# EAGLE board Food Contamination Detector (EAGLE 8.6.2)
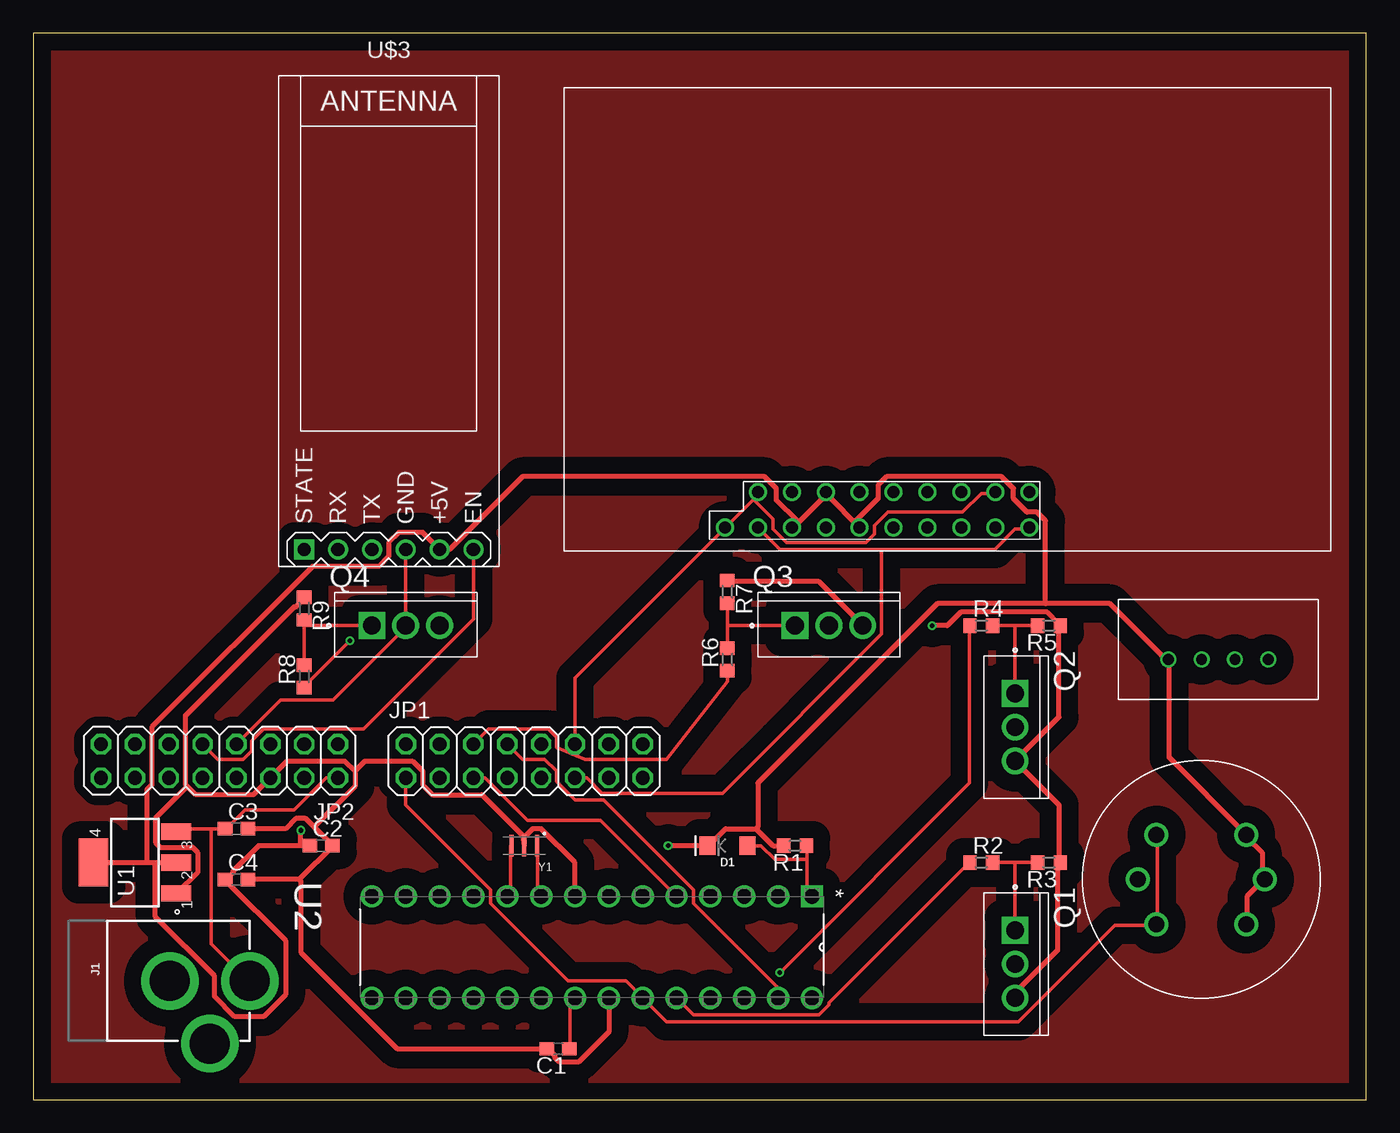
[diagram p0: board, top side]
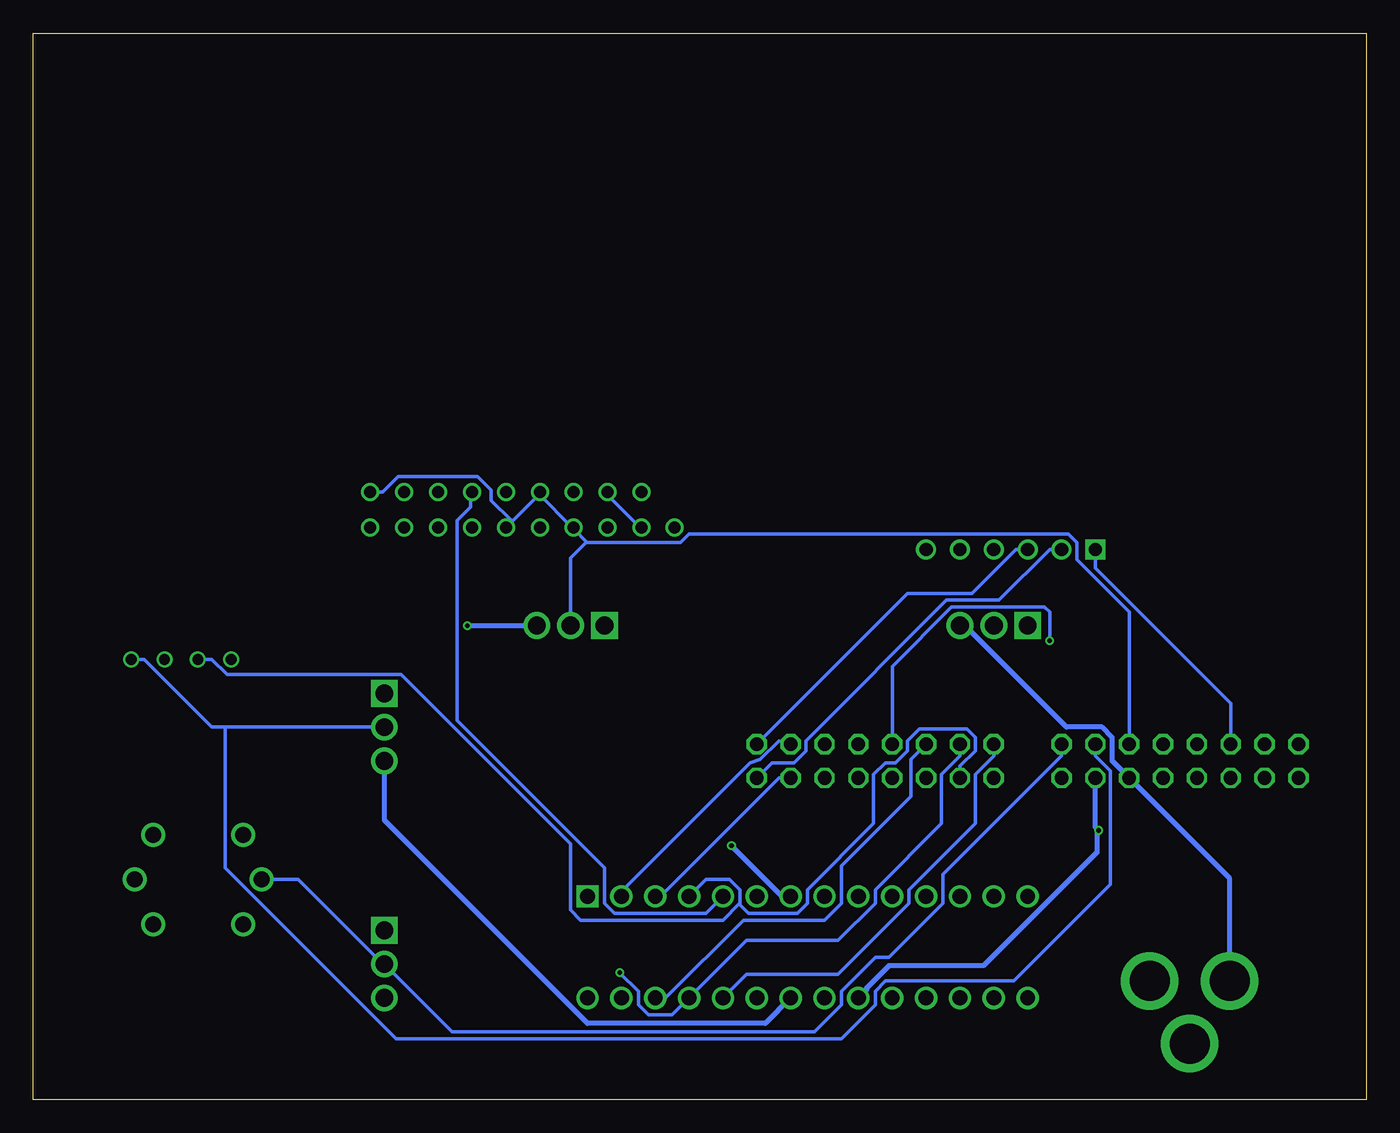
[diagram p1: board, bottom side, seen from below]

Size 100 x 80 mm. Coordinates in mm from the lower left corner, seen from the top.
Outline: 0,0 100,0 100,80 0,80 0,0
Copper layers (1*16): Top 0.035mm / dielectric 1.5mm / Bottom 0.035mm
Design rules "PCBWay_2layer": minimum track width 6mil, minimum drill 0.3mm, track to track 6mil, track to pad 6mil, pad to pad 6mil, via to via 6mil, smd to smd 4mil, copper to edge 10mil, drill to drill 6mil, minimum pad ring 6mil, minimum via ring 6mil, stop-mask expansion 4mil, vias tented up to drill 0.8mm, thermal gap 10mil
Net classes: 0 default: width 0.254 mm, drill 0.254 mm, clearance 0.254 mm; 1 ground: width 0.381 mm, drill 0.254 mm, clearance 0.254 mm; 2 5V: width 0.381 mm, drill 0.254 mm, clearance 0.254 mm

## Footprints (pad centres in the part's own frame; a part is rotated, then mirrored left to right if it is on the bottom)
C0603 = smd 1.1 x 1: 1 -0.85,0; 2 0.85,0
LED-1206 = smd 1.2 x 1.4: A -1.5,0; C 1.5,0
POWER_JACK_PTH = drill 2.997 pad 4.318: GND 0,7.7; GNDBREAK 4.7,10.7; PWR 0,13.7
2X08 = drill 1.016 octagon: 1 -8.89,-1.27; 2 -8.89,1.27; 3 -6.35,-1.27; 4 -6.35,1.27; 5 -3.81,-1.27; 6 -3.81,1.27; 7 -1.27,-1.27; 8 -1.27,1.27; 9 1.27,-1.27; 10 1.27,1.27; 11 3.81,-1.27; 12 3.81,1.27; 13 6.35,-1.27; 14 6.35,1.27; 15 8.89,-1.27; 16 8.89,1.27
TO254P1067X483X3124-3P = drill 1.34 square: 1 -2.54,0 | drill 1.34: 2 0,0; 3 2.54,0
R0603 = smd 1 x 1.1: 1 -0.85,0; 2 0.85,0
SOT223 = smd 2.235 x 1.219: 1 -3.099,2.311; 2 -3.099,0; 3 -3.099,-2.311 | smd 2.2 x 3.6: 4 3.099,0
DIP254P762X457-28 = drill 1.118 square: 1 -7.62,33.02 | drill 1.118: 2 -7.62,30.48; 3 -7.62,27.94; 4 -7.62,25.4; 5 -7.62,22.86; 6 -7.62,20.32; 7 -7.62,17.78; 8 -7.62,15.24; 9 -7.62,12.7; 10 -7.62,10.16; 11 -7.62,7.62; 12 -7.62,5.08; 13 -7.62,2.54; 14 -7.62,0; 15 0,0; 16 0,2.54; 17 0,5.08; 18 0,7.62; 19 0,10.16; 20 0,12.7; 21 0,15.24; 22 0,17.78; 23 0,20.32; 24 0,22.86; 25 0,25.4; 26 0,27.94; 27 0,30.48; 28 0,33.02
DHT22 = drill 0.8: 1 -3.75,0; 2 -1.25,0; 3 1.25,0; 4 3.75,0
MH-Z14 = drill 0.9: 1 -6.6,-15.5; 2 -6.6,-12.85; 3 -4.05,-15.5; 4 -4.05,-12.85; 5 -1.5,-15.5; 6 -1.5,-12.85; 7 1.05,-15.5; 8 1.05,-12.85; 9 3.6,-15.5; 10 3.6,-12.85; 11 6.15,-15.5; 12 6.15,-12.85; 13 -14.2,-12.85; 14 -11.65,-12.85; 15 -9.1,-12.85; 16 -9.1,-15.5; 17 -11.65,-15.5; 18 -14.2,-15.5; 19 -16.7,-15.5
WIRELESS-BLUETOOTH-HC-05 = drill 1 square: 1 -6.35,-17.145 | drill 1: 2 -3.81,-17.145; 3 -1.27,-17.145; 4 1.27,-17.145; 5 3.81,-17.145; 6 6.35,-17.145
TGS822 = drill 1.2 pad 1.6: 1 3.36,3.36; 2 4.75,0; 3 3.36,-3.36; 4 -3.36,-3.36; 5 -4.75,0; 6 -3.36,3.36
OSC_CSTCE16M0V53-R0 = smd 0.3 x 1.6: 1 -0.95,0; 2 0,0; 3 0.95,0

## Placement (x,y rotation side)
C1  100nF  [C0603]  39.37,3.81 180 top
C2  100nF  [C0603]  21.59,19.05 0 top
C3  0.33uF  [C0603]  15.24,20.32 0 top
C4  0.33uF  [C0603]  15.24,16.51 0 top
D1  [LED-1206]  52.07,19.05 180 top
J1  POWER_JACK  [POWER_JACK_PTH]  2.54,8.89 270 top
JP1  [2X08]  36.83,25.4 0 top
JP2  [2X08]  13.97,25.4 180 top
Q1  IRLZ44NPBF  [TO254P1067X483X3124-3P]  73.66,10.16 270 top
Q2  IRLZ44NPBF  [TO254P1067X483X3124-3P]  73.66,27.94 270 top
Q3  IRLZ44NPBF  [TO254P1067X483X3124-3P]  59.69,35.56 0 top
Q4  IRLZ44NPBF  [TO254P1067X483X3124-3P]  27.94,35.56 0 top
R1  10k  [R0603]  57.15,19.05 180 top
R2  10  [R0603]  71.12,17.78 0 top
R3  10k  [R0603]  76.2,17.78 180 top
R4  10  [R0603]  71.12,35.56 0 top
R5  10k  [R0603]  76.2,35.56 180 top
R6  10  [R0603]  52.07,33.02 90 top
R7  10k  [R0603]  52.07,38.1 270 top
R8  10  [R0603]  20.32,31.75 90 top
R9  10k  [R0603]  20.32,36.83 270 top
U1  LD1117S33CTR  [SOT223]  7.62,17.78 180 top
U2  ATMEGA328P-PU  [DIP254P762X457-28]  25.4,7.62 270 top
U$1  DHT22  [DHT22]  88.9,33.02 0 top
U$2  MHZ14  [MH-Z14]  68.58,58.42 0 top
U$3  WIRELESS-BLUETOOTH-HC-05  [WIRELESS-BLUETOOTH-HC-05]  26.67,58.42 0 top
U$4  TGS822  [TGS822]  87.63,16.51 0 top
Y1  CSTCE16M0V53-R0  [OSC_CSTCE16M0V53-R0]  36.83,19.05 180 top

## Library data of the parts
C1-C4 = rcl; SPICEPREFIX: C
D1 = SparkFun-LED
J1 = SparkFun-Connectors; PROD_ID: CONN-08197
JP1 JP2 = pinhead
Q1-Q4 = TO254P1067X483X3124-3P
R1-R9 = rcl; SPICEPREFIX: R
U1 = LD1117S33CTR; AVAILABILITY: Good; DESCRIPTION: LD1117 Series 1300 mA 3.3 V Fixed Output Positive Voltage LDO Regulator- SOT-223; MF: STMicroelectronics; MP: LD1117S33CTR; PACKAGE: SOT-223 STMicroelectronics; PRICE: 0.19 USD
U2 = Atmel_By_element14_Batch_1-00; MPN: ATMEGA328P-PU; OC_FARNELL: 1715487; OC_NEWARK: 15R0268; PACKAGE: PDIP-28; SUPPLIER: Atmel
U$1 U$2 U$4 = TGS822
U$3 = diy-modules
Y1 = CSTCE16M0V53-R0; AVAILABILITY: Good; DESCRIPTION: Ceramic Resonator 16MHz ??0.5% (Tol) ??0.3% (Stability) 15pF 40Ohm 3-Pin CSMD T/R; MF: Murata; MP: CSTCE16M0V53-R0; PACKAGE: SMD-3 Murata; PRICE: 0.29 USD

## Nets
5V [5V]: C2.1 C4.1 D1.C JP2.4 R1.2 U1.2 U1.4 U2.7 U2.20 U$1.1 U$2.1 U$2.15 U$2.17 U$3.5 U$4.1 U$4.2 U$4.3
DHT22_DATA: JP1.3 U2.4 U$1.2
DHT22_SWITCH: JP2.3 Q2.2 U$1.4
DHT22_SWITCH_IN: JP1.4 R4.1 U2.25
GND [ground]: C1.2 C2.2 C3.2 C4.2 J1.GND JP2.6 Q1.3 Q2.3 Q3.3 Q4.3 R3.1 R5.1 R7.1 R9.1 U1.1 U2.8 U2.22 Y1.2
HC05_EN: JP2.9 U$3.6
HC05_STATE: JP2.11 U$3.1
HC05_SWITCH: JP2.7 Q4.2 U$3.4
HC05_SWITCH_IN: JP1.8 R8.1 U2.27
HC05_UART_RXD: JP1.15 U$3.2
HC05_UART_TXD: JP1.16 U$3.3
MCU_RXD: JP1.13 U2.3
MCU_TXD: JP1.14 U2.2
MHZ14_PWM: JP1.5 U2.5 U$2.6
MHZ14_SWITCH: JP2.5 Q3.2 U$2.2 U$2.3 U$2.12 U$2.16
MHZ14_SWITCH_IN: JP1.6 R6.1 U2.26
MHZ14_UART_RXD: JP1.11 U$2.11 U$2.14 U$2.18
MHZ14_UART_TXD: JP1.12 U$2.10 U$2.13 U$2.19
N$1: U2.9 Y1.1
N$2: C1.1 U2.21
N$3: U2.10 Y1.3
N$4: D1.A R1.1 U2.1
N$6: Q2.1 R4.2 R5.2
N$7: Q1.1 R2.2 R3.2
N$8: Q3.1 R6.2 R7.2
N$9: Q4.1 R8.2 R9.2
TGS822_SWITCH: JP2.1 Q1.2 U$4.5
TGS822_SWITCH_IN: JP1.2 R2.1 U2.24
TGS822_VLR: JP1.1 U2.23 U$4.4 U$4.6
VIN: C3.1 J1.PWR JP2.2 U1.3

## Tracks (layer width: path | path; a pad name or v marks a point on that pad's centre or on a via)
5V  (via drill 0.35)
  Top 0.381: U1.4 8.51,17.78 | 8.51,17.78 9.14,17.78 | 9.14,17.78 U1.2 | C2.1 20.07,19.05 | 20.07,19.05 16.89,19.05 14.99,17.14 14.99,17.02 14.48,16.51 C4.1 14.48,16.38 18.92,11.94 18.92,7.87 17.27,6.22 15.11,6.22 13.59,7.75 13.59,9.27 9.14,13.72 9.14,17.78 | 20.07,19.05 v20.07,20.19 | R1.2 55.5,19.05 54.23,20.32 | 54.23,20.32 51.94,20.32 50.67,19.05 D1.C v47.62,19.05 | U$4.3 91.06,13.21 91.06,15.24 92.33,16.51 U$4.2 92.2,16.64 92.2,18.54 91.06,19.68 U$4.1 90.93,19.94 85.22,25.65 85.22,33.02 U$1.1 84.96,33.02 80.77,37.21 75.95,37.21 | 75.95,37.21 67.82,37.21 54.36,23.75 54.36,20.45 54.23,20.32 | 75.95,37.21 75.95,43.43 75.31,44.07 74.55,44.07 73.53,45.09 73.53,45.85 72.64,46.74 64.01,46.74 63.37,46.1 63.37,45.09 61.72,43.43 U$2.1 59.56,45.34 U$2.15 59.56,45.47 57.02,42.93 U$2.17 57.28,43.43 55.75,44.96 55.75,45.85 54.86,46.74 36.7,46.74 31.24,41.27 U$3.5 29.21,42.55 27.43,42.55 26.67,41.78 26.67,40.77 25.91,40.01 20.95,40.01 8.89,27.94 8.89,23.62 8.51,23.24 8.51,17.78
  Bottom 0.381: JP2.4 20.32,20.45 v20.07,20.19 20.19,20.07 20.19,18.54 28.7,10.03 35.81,10.03 37.47,8.38 37.47,8.26 U2.20 | U2.7 43.81,15.24 v47.62,19.05
DHT22_DATA
  Bottom 0.254: U$1.2 86.61,33.02 85.47,31.88 72.39,31.88 59.69,19.18 59.69,14.22 58.93,13.46 48.26,13.46 47.05,14.67 | 47.05,14.67 46.99,14.73 46.99,15.75 47.75,16.51 49.53,16.51 U2.4 | JP1.3 30.48,25.02 29.34,26.16 29.34,27.18 29.97,27.81 33.53,27.81 34.42,26.92 34.42,26.16 35.31,25.27 36.07,25.27 36.96,24.38 36.96,20.7 41.91,15.75 41.91,14.73 42.67,13.97 46.35,13.97 47.05,14.67
DHT22_SWITCH
  Bottom 0.254: U$1.4 91.69,33.02 86.61,27.94 85.6,27.94 | Q2.2 85.6,27.94 | JP2.3 20.32,25.78 19.18,24.64 19.18,16.13 26.42,8.89 36.07,8.89 36.83,8.13 36.83,7.11 39.37,4.57 72.77,4.57 85.6,17.4 85.6,27.94
DHT22_SWITCH_IN  (via drill 0.35)
  Top 0.254: v56.01,9.53 70.23,23.75 70.23,35.56 R4.1
  Bottom 0.254: v56.01,9.53 54.61,8.13 54.61,7.11 53.85,6.35 52.07,6.35 U2.25 46.48,11.94 39.62,11.94 36.83,14.73 36.83,15.75 31.88,20.7 31.88,24.38 30.48,25.78 JP1.4
GND  (via drill 0.35)
  Top 0.381: Q3.3 58.93,38.86 52.07,38.86 R7.1 | Q1.3 73.66,8 76.83,11.18 76.83,17.65 R3.1 76.96,17.78 76.96,22.1 Q2.3 76.96,28.7 76.96,35.56 R5.1 76.96,35.69 76.07,36.58 69.6,36.58 68.58,35.56 v67.44,35.56 | U2.22 43.18,5.08 40.89,2.79 39.5,2.79 39.12,3.17 39.12,3.3 38.61,3.81 C1.2 27.3,3.81 20.07,11.05 20.07,16.38 19.94,16.51 | U2.8 40.64,17.78 38.1,20.32 37.47,20.32 36.83,19.68 Y1.2 36.7,19.81 33.66,22.86 29.97,22.86 29.21,23.62 29.21,24.64 28.45,25.4 24.89,25.4 24.13,24.64 | 19.94,16.51 C4.2 | 19.94,16.51 22.48,19.05 C2.2 22.35,19.18 21.08,20.45 | C3.2 18.92,20.32 19.68,21.08 20.45,21.08 21.08,20.45 | 11.56,23.5 12.19,22.86 16.51,22.86 JP2.6 19.05,25.4 23.37,25.4 24.13,24.64 | 11.56,23.5 11.43,23.62 11.43,28.83 19.56,36.96 19.68,36.96 20.32,37.59 R9.1 | 11.56,23.5 9.14,21.08 9.14,19.3 9.53,18.92 11.94,18.92 12.32,18.54 12.32,17.02 10.79,15.49 U1.1 | 21.08,20.45 24.13,23.5 24.13,24.64
  Bottom 0.381: v67.44,35.56 Q3.3 | Q4.3 30.1,35.56 22.48,27.94 19.81,27.94 19.05,27.18 19.05,25.4 JP2.6 10.29,16.64 10.29,8.89 J1.GND | Q2.3 73.66,20.95 58.42,5.71 45.09,5.71 U2.22
GROUND
  pour Top (isolate 1.27): 1.27,2.54 1.27,78.74 99.06,78.74 99.06,1.27 1.27,1.27
HC05_EN
  Top 0.254: U$3.6 33.02,36.07 24.77,27.81 17.27,27.81 16.38,26.92 16.38,26.16 15.75,25.53 13.84,25.53 JP2.9
HC05_STATE
  Bottom 0.254: U$3.1 20.32,39.88 10.16,29.72 JP2.11
HC05_SWITCH
  Top 0.254: U$3.4 Q4.2 27.94,35.43 22.48,29.97 18.54,29.97 JP2.7
HC05_SWITCH_IN  (via drill 0.35)
  Top 0.254: v23.75,34.42 20.32,30.99 R8.1 | U2.27 55.88,8.38 49.53,14.73 49.53,15.75 42.8,22.48 40.64,22.48 39.24,23.88 39.24,24.64 38.35,25.53 36.7,25.53 JP1.8
  Bottom 0.254: v23.75,34.42 23.75,36.58 24.13,36.96 31.11,36.96 35.56,32.51 JP1.8
HC05_UART_RXD
  Bottom 0.254: U$3.2 23.75,41.27 27.56,37.47 31.5,37.47 42.04,26.92 42.04,26.16 42.93,25.27 44.58,25.27 JP1.15
HC05_UART_TXD
  Bottom 0.254: U$3.3 26.29,41.27 29.59,37.97 34.42,37.97 JP1.16
MCU_RXD
  Bottom 0.254: JP1.13 44.07,24.13 52.96,15.24 U2.3
MCU_TXD
  Bottom 0.254: JP1.14 44.07,26.92 45.47,25.53 46.23,25.27 55.88,15.62 U2.2
MHZ14_PWM
  Top 0.254: JP1.5 33.91,24.13 37.08,20.95 42.55,20.95 U2.5
  Bottom 0.254: U2.5 49.53,13.97 56.39,13.97 57.15,14.73 57.15,17.4 68.2,28.45 68.2,43.43 67.18,44.45 67.18,45.47 U$2.6
MHZ14_SWITCH
  Bottom 0.254: U$2.12 74.68,45.59 73.79,45.59 72.64,46.74 66.67,46.74 65.66,45.72 65.66,44.96 64.14,43.43 U$2.3 64.52,42.93 62.1,45.34 U$2.2 62.1,45.47 59.56,42.93 U$2.16 59.44,42.8 58.48,41.85 | JP2.5 17.78,36.58 21.72,40.51 21.72,41.78 22.35,42.42 50.8,42.42 51.44,41.78 58.42,41.78 58.48,41.85 | Q3.2 59.69,40.64 58.48,41.85
MHZ14_SWITCH_IN
  Top 0.254: R6.1 52.07,31.37 47.5,25.53 41.4,25.53 39.24,26.42 39.24,27.18 38.61,27.81 34.16,27.81 JP1.6
  Bottom 0.254: U2.26 52.58,7.62 46.74,13.46 40.64,13.46 39.37,14.73 39.37,17.53 34.16,22.73 34.16,25.53 JP1.6
MHZ14_UART_RXD
  Top 0.254: 63.63,41.27 56.01,41.27 54.48,42.8 U$2.18 | 63.63,41.27 72.14,41.27 73.66,42.8 74.68,42.8 U$2.11 | JP1.11 41.53,24.13 42.67,22.99 51.69,22.99 63.63,34.92 63.63,41.27
  Bottom 0.254: U$2.18 54.48,42.93 57.02,45.47 U$2.14
MHZ14_UART_TXD
  Top 0.254: U$2.10 72.14,45.47 71.12,45.47 69.72,44.07 64.14,44.07 63.12,43.05 63.12,42.42 62.48,41.78 56.52,41.78 55.5,42.8 55.5,43.56 54.1,44.96 U$2.13 54.48,45.47 51.94,42.93 U$2.19 51.82,42.8 40.64,31.62 JP1.12
N$1
  Top 0.254: U2.9 37.85,15.49 37.85,19.05 Y1.1
N$2
  Top 0.254: U2.21 40.26,7.24 40.26,3.81 C1.1
N$3
  Top 0.254: U2.10 35.81,15.49 35.81,19.05 Y1.3
N$4
  Top 0.254: 58.04,18.03 58.04,15.62 U2.1 | 58.04,18.03 58.04,19.05 R1.1 | D1.A 54.61,19.05 55.63,18.03 58.04,18.03
N$6
  Top 0.254: R5.2 73.66,35.56 | 73.66,35.56 R4.2 | Q2.1 73.66,35.56
N$7
  Top 0.254: R3.2 73.66,17.78 | 73.66,17.78 R2.2 | Q1.1 73.66,17.78
N$8
  Top 0.254: R7.2 52.07,35.56 | 52.07,35.56 R6.2 | Q3.1 52.07,35.56
N$9
  Top 0.254: 20.32,35.56 R9.2 20.32,35.94 | 20.32,35.56 R8.2 | Q4.1 20.32,35.56
TGS822_SWITCH
  Bottom 0.254: JP2.1 22.86,25.78 31.75,16.89 31.75,14.73 35.81,10.67 36.83,10.67 39.37,8.13 39.37,7.11 41.4,5.08 68.58,5.08 Q1.2 73.66,10.03 80.14,16.51 U$4.5
TGS822_SWITCH_IN
  Top 0.254: U2.24 49.53,6.35 58.93,6.35 59.69,7.11 59.69,7.24 70.23,17.78 R2.1
  Bottom 0.254: JP1.2 27.94,25.78 29.34,24.38 29.34,20.7 34.29,15.75 34.29,14.73 39.62,9.4 46.48,9.4 U2.24
TGS822_VLR
  Top 0.254: U$4.6 84.33,19.81 84.33,13.21 U$4.4 84.2,13.08 81.15,13.08 73.91,5.84 47.5,5.84 U2.23 44.45,8.89 40.13,8.89 34.29,14.73 34.29,15.75 27.94,22.1 JP1.1
VIN
  Top 0.254: 13.34,20.32 10.92,20.32 10.79,20.19 U1.3 | 13.34,20.32 C3.1 14.48,20.32 15.88,21.72 19.56,21.72 21.97,24.13 JP2.2 | 13.34,20.32 13.34,11.68 16.13,8.89 J1.PWR